# Altium PCB PCB_led_hearrt.PcbDoc
Units mm, origin at the board's own origin, x right, y up, seen from the top; angles counter-clockwise.
Board outline 98.43 x 98.81 mm, 2 copper layers (Top Layer, Bottom Layer); 105 components, 66 nets, 350 pads, 60 vias.
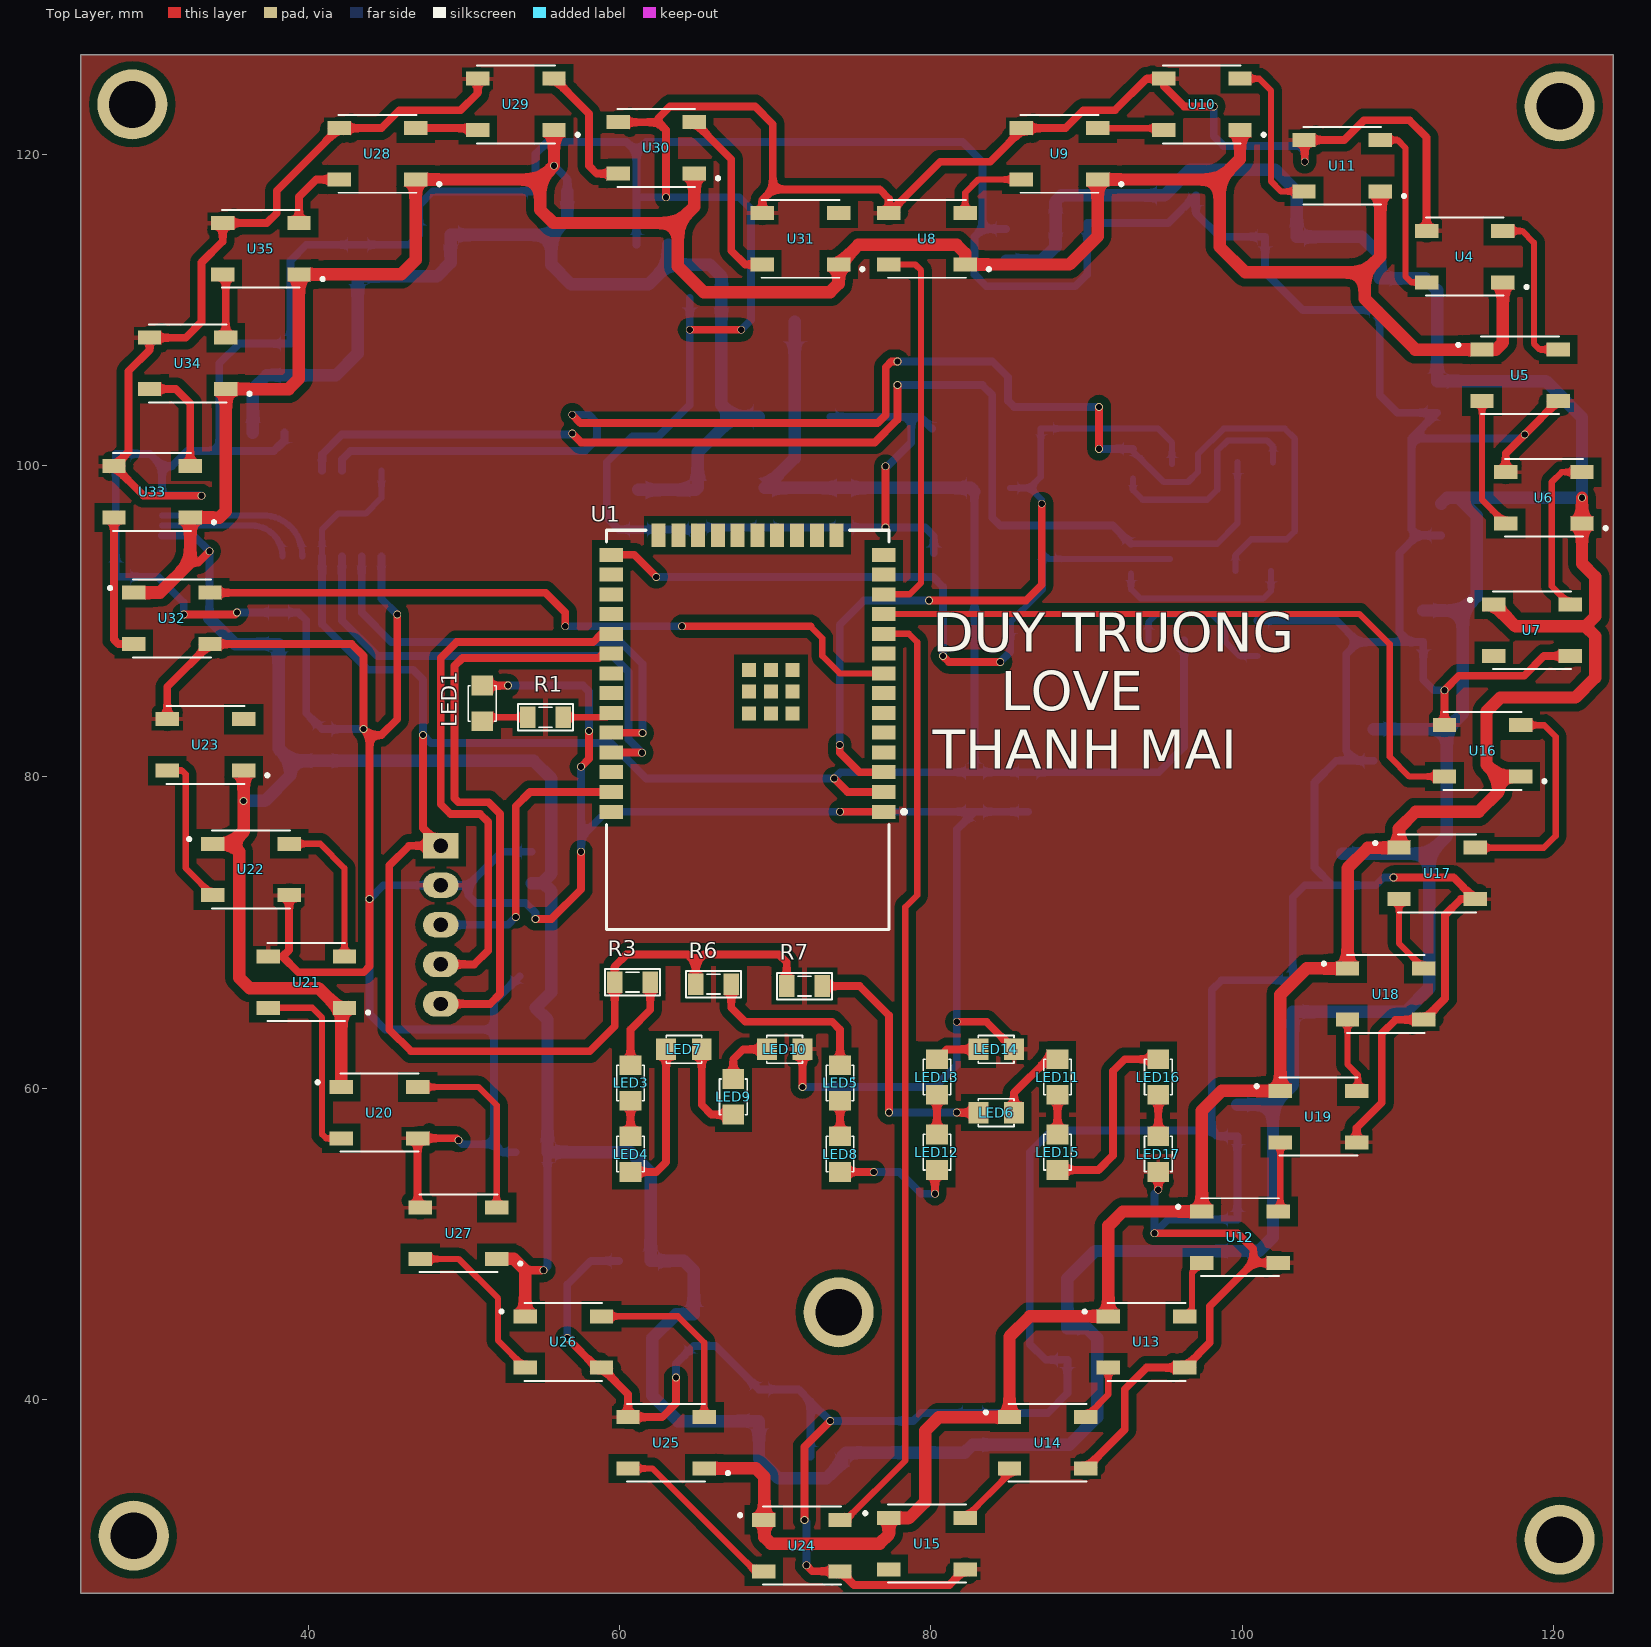
[diagram p0: Top Layer view]
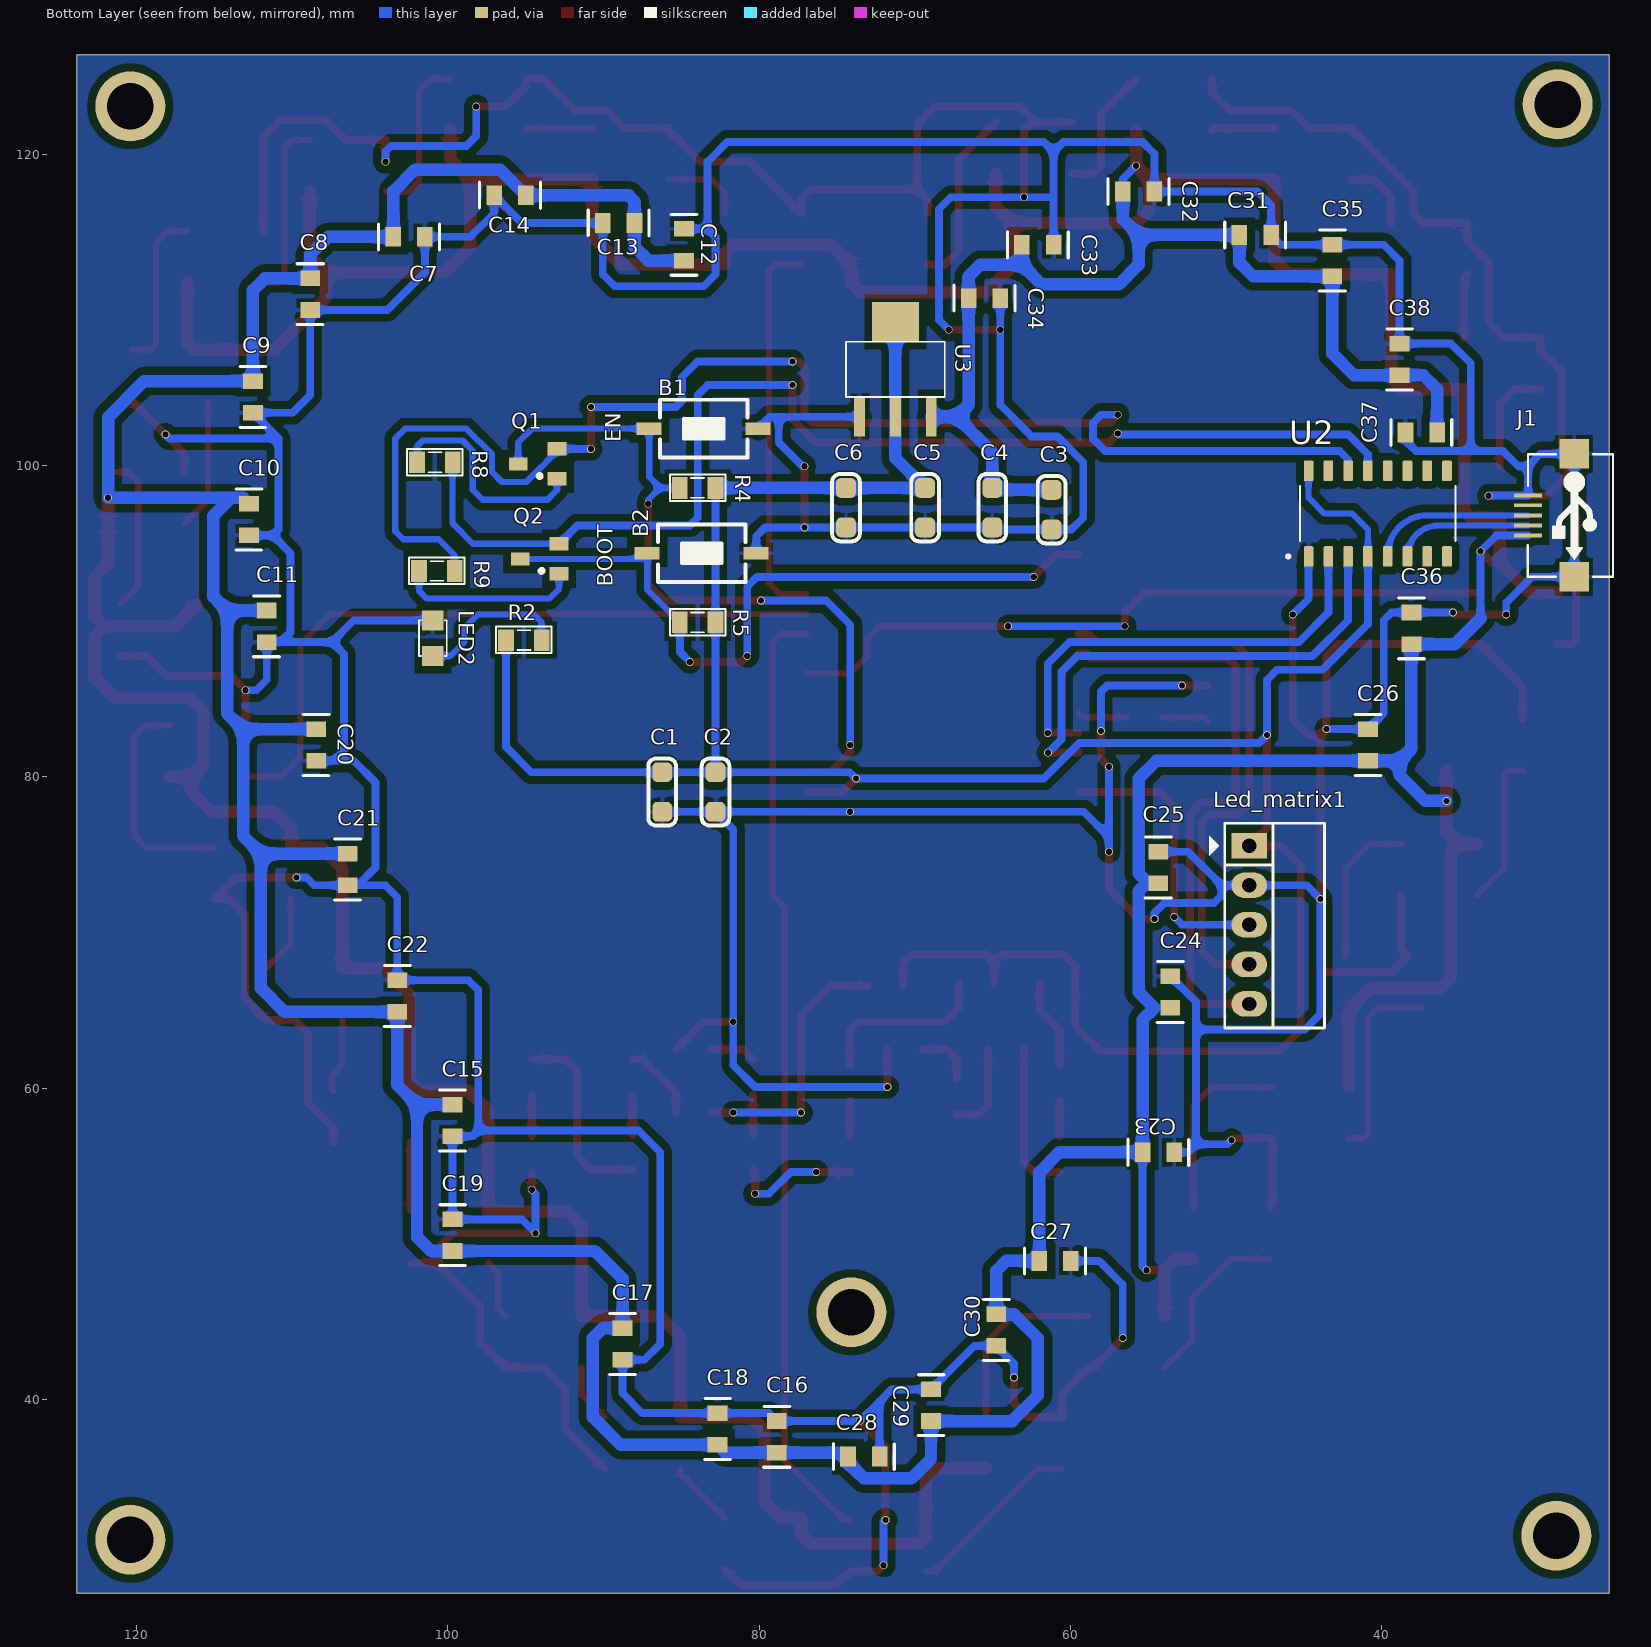
[diagram p1: Bottom Layer view, seen from below]
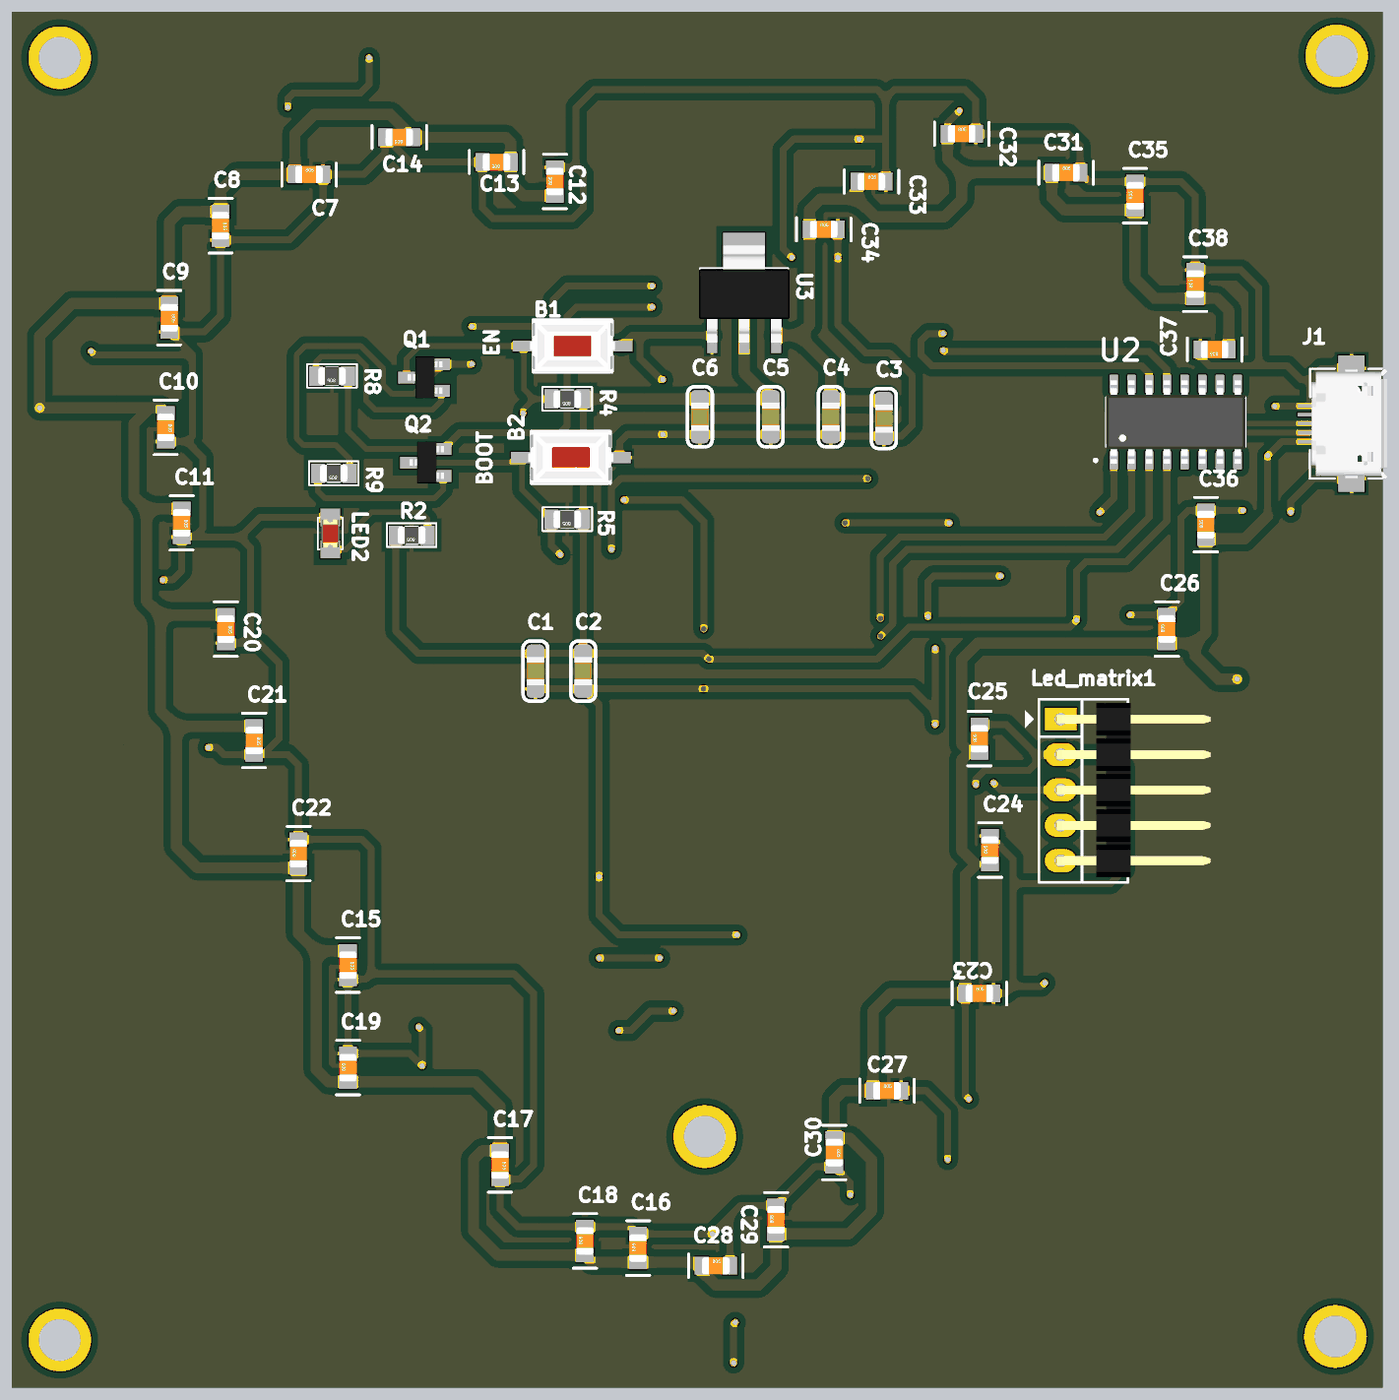
[diagram p2: 3D render of the assembled board from below, using the file's embedded part models]

## Layer stack, top to bottom
Top Solder: solder mask 0.0102, Solder Resist, Dk 3.5
Top Layer: signal copper 0.0356
Dielectric 1: dielectric 0.32, FR-4, Dk 4.8
Bottom Layer: signal copper 0.0356
Bottom Solder: solder mask 0.0102, Solder Resist, Dk 3.5

## Board outline
25.4,126.365 123.825,126.365 123.825,27.559 25.4,27.559

## Design rules (kind name [scope] priority, off if disabled: settings)
Clearance [All] p1: gap=0.178 ignorepadtopadclearanceinfootprint=FALSE except(0.254: Arc-Via Track-Via SMDPad-Via THPad-Via Via-Via; 0.508: Arc-Fill Arc-Poly Arc-Region Track-Fill Track-Poly Track-Region SMDPad-Fill SMDPad-Poly SMDPad-Region THPad-Fill THPad-Poly THPad-Region Via-Fill Via-Poly Via-Region Fill-Fill Fill-Poly Fill-Region Poly-Poly Poly-Region Region-Region)
PolygonConnect [All] p1: connectstyle=Relief reliefconductorwidth=0.254 reliefentries=4 polygonreliefangle="90 Angle" airgapwidth=0.254
RoutingVias [All] p1: holewidth=0.4 width=0.5 viastyle="Through Hole" minholewidth=0.4 minwidth=0.5 maxholewidth=0.5 maxwidth=0.7
SolderMaskExpansion [All] p1: expansion=0.102
Width [All] p1: maxlimit=0.8 minlimit=0.4 preferedwidth=0.5
30 further rules are at their usual default settings.

## Classes and differential pairs
component class U_led: C7 C8 C9 C10 C11 C12 C13 C14 C15 C16 C17 C18 C19 C20 C21 C22 C23 C24 C25 C26 C27 C28 C29 C30 C31 C32 C33 C34 C35 C36 C37 C38 U4 U5 U6 U7 U8 U9 U10 U11 U12 U13 U14 U15 U16 U17 U18 U19 U20 U21 U22 U23 U24 U25 U26 U27 U28 U29 U30 U31 U32 U33 U34 U35
component class U_esp32: B1 B2 C1 C2 C3 C4 C5 C6 J1 LED1 LED2 LED3 LED4 LED5 LED6 LED7 LED8 LED9 LED10 LED11 LED12 LED13 LED14 LED15 LED16 LED17 Led_matrix1 Q1 Q2 R1 R2 R3 R4 R5 R6 R7 R8 R9 U1 U2 U3

## Components (designator, comment, footprint, x,y, rotation, side; value= is the part's Value field where it differs from the comment)
B1 "EN" BUTTON_2_SMD 83.566,102.362 r0 bottom
B2 "BOOT" BUTTON_2_SMD 83.693,94.361 r0 bottom
C1 "100nF" CAP_0805 86.233,79.018 r270 bottom value=33p
C2 "10uF" CAP_0805 82.804,79.018 r270 bottom value=33p
C3 "10uF" CAP_0805 61.214,97.155 r270 bottom value=33p
C4 "100nF" CAP_0805 65.024,97.282 r270 bottom value=33p
C5 "10uF" CAP_0805 69.342,97.282 r270 bottom value=33p
C6 "100nF" CAP_0805 74.422,97.282 r270 bottom value=33p
C7 "Capacitor Ceramic" C0805 102.489,114.681 r180 bottom value=33p
C8 "Capacitor Ceramic" C0805 108.839,110.998 r270 bottom value=33p
C9 "Capacitor Ceramic" C0805 112.522,104.394 r270 bottom value=33p
C10 "Capacitor Ceramic" C0805 112.776,96.52 r270 bottom value=33p
C11 "Capacitor Ceramic" C0805 111.633,89.662 r270 bottom value=33p
C12 "Capacitor Ceramic" C0805 84.836,114.173 r90 bottom value=33p
C13 "Capacitor Ceramic" C0805 89.027,115.57 r0 bottom value=33p
C14 "Capacitor Ceramic" C0805 96.012,117.348 r0 bottom value=33p
C15 "Capacitor Ceramic" C0805 99.695,57.912 r270 bottom value=33p
C16 "Capacitor Ceramic" C0805 78.867,37.592 r90 bottom value=33p
C17 "Capacitor Ceramic" C0805 88.773,43.561 r270 bottom value=33p
C18 "Capacitor Ceramic" C0805 82.677,38.1 r90 bottom value=33p
C19 "Capacitor Ceramic" C0805 99.695,50.546 r90 bottom value=33p
C20 "Capacitor Ceramic" C0805 108.458,82.036 r270 bottom value=33p
C21 "Capacitor Ceramic" C0805 106.426,74.041 r270 bottom value=33p
C22 "Capacitor Ceramic" C0805 103.251,65.913 r90 bottom value=33p
C23 "Capacitor Ceramic" C0805 54.356,55.88 r180 bottom value=33p
C24 "Capacitor Ceramic" C0805 53.594,66.167 r90 bottom value=33p
C25 "Capacitor Ceramic" C0805 54.356,74.168 r90 bottom value=33p
C26 "Capacitor Ceramic" C0805 40.894,82.042 r90 bottom value=33p
C27 "Capacitor Ceramic" C0805 60.987,48.895 r180 bottom value=33p
C28 "Capacitor Ceramic" C0805 73.279,36.322 r180 bottom value=33p
C29 "Capacitor Ceramic" C0805 68.961,39.624 r90 bottom value=33p
C30 "Capacitor Ceramic" C0805 64.77,44.45 r270 bottom value=33p
C31 "Capacitor Ceramic" C0805 48.133,114.808 r180 bottom value=33p
C32 "Capacitor Ceramic" C0805 55.626,117.602 r180 bottom value=33p
C33 "Capacitor Ceramic" C0805 62.103,114.173 r180 bottom value=33p
C34 "Capacitor Ceramic" C0805 65.532,110.744 r180 bottom value=33p
C35 "Capacitor Ceramic" C0805 43.18,113.157 r90 bottom value=33p
C36 "Capacitor Ceramic" C0805 38.1,89.535 r90 bottom value=33p
C37 "Capacitor Ceramic" C0805 37.465,102.108 r0 bottom value=33p
C38 "Capacitor Ceramic" C0805 38.862,106.807 r90 bottom value=33p
J1 "USB-5" USB-M1 30.607,96.789 r270 bottom
LED1 "LED" LED-0805-Red 51.181,83.565 r90 top value="LED 3 ly Single Colour"
LED2 "LED" LED-0805-Red 100.965,87.757 r90 bottom value="LED 3 ly Single Colour"
LED3 "LED" LED-0805-Red 60.706,61.468 r270 top value="LED 3 ly Single Colour"
LED4 "LED" LED-0805-Red 60.706,56.896 r270 top value="LED 3 ly Single Colour"
LED5 "LED" LED-0805-Red 74.168,61.468 r270 top value="LED 3 ly Single Colour"
LED6 "LED" LED-0805-Red 83.058,58.42 r0 top value="LED 3 ly Single Colour"
LED7 "LED" LED-0805-Red 62.992,62.484 r0 top value="LED 3 ly Single Colour"
LED8 "LED" LED-0805-Red 74.168,56.896 r270 top value="LED 3 ly Single Colour"
LED9 "LED" LED-0805-Red 67.31,58.293 r90 top value="LED 3 ly Single Colour"
LED10 "LED" LED-0805-Red 69.469,62.484 r0 top value="LED 3 ly Single Colour"
LED11 "LED" LED-0805-Red 88.138,61.849 r270 top value="LED 3 ly Single Colour"
LED12 "LED" LED-0805-Red 80.391,54.737 r90 top value="LED 3 ly Single Colour"
LED13 "LED" LED-0805-Red 80.391,59.563 r90 top value="LED 3 ly Single Colour"
LED14 "LED" LED-0805-Red 83.058,62.484 r0 top value="LED 3 ly Single Colour"
LED15 "LED" LED-0805-Red 88.138,57.023 r270 top value="LED 3 ly Single Colour"
LED16 "LED" LED-0805-Red 94.615,61.849 r270 top value="LED 3 ly Single Colour"
LED17 "LED" LED-0805-Red 94.615,56.896 r270 top value="LED 3 ly Single Colour"
Led_matrix1 "JP5" JP5H 48.514,75.565 r270 bottom
Q1 "C1815" SOT23 94.234,100.076 r90 bottom
Q2 "C1815" SOT23 94.107,93.98 r90 bottom
R1 "1k" RES-SMD-0805 55.245,83.819 r0 top
R2 "1k" RES-SMD-0805 95.123,88.773 r0 bottom
R3 "120" RES-SMD-0805 60.833,66.802 r0 top
R4 "10k" RES-SMD-0805 83.947,98.552 r0 bottom
R5 "10k" RES-SMD-0805 83.947,89.916 r0 bottom
R6 "120" RES-SMD-0805 66.04,66.675 r0 top
R7 "120" RES-SMD-0805 71.882,66.549 r0 top
R8 "10k" RES-SMD-0805 100.838,100.203 r0 bottom
R9 "10k" RES-SMD-0805 100.711,93.218 r0 bottom
U1 "ESP32-WROOM-32" ESP32_WROOM32E 68.531,85.345 r180 top
U2 "CH340C" SOIC127P600X180-16N 40.259,96.901 r90 bottom
U3 "LM1117-ADJ" LM1117-SOP 71.247,104.394 r180 bottom
U4 "WS2812B-B" LED_WS2812B-B 114.3,113.411 r180 top
U5 "WS2812B-B" LED_WS2812B-B 117.856,105.791 r0 top
U6 "WS2812B-B" LED_WS2812B-B 119.38,97.917 r180 top
U7 "WS2812B-B" LED_WS2812B-B 118.618,89.408 r0 top
U8 "WS2812B-B" LED_WS2812B-B 79.756,114.554 r180 top
U9 "WS2812B-B" LED_WS2812B-B 88.265,120.015 r180 top
U10 "WS2812B-B" LED_WS2812B-B 97.409,123.19 r180 top
U11 "WS2812B-B" LED_WS2812B-B 106.426,119.253 r180 top
U12 "WS2812B-B" LED_WS2812B-B 99.859,50.419 r0 top
U13 "WS2812B-B" LED_WS2812B-B 93.853,43.688 r0 top
U14 "WS2812B-B" LED_WS2812B-B 87.503,37.211 r0 top
U15 "WS2812B-B" LED_WS2812B-B 79.756,30.734 r0 top
U16 "WS2812B-B" LED_WS2812B-B 115.443,81.661 r180 top
U17 "WS2812B-B" LED_WS2812B-B 112.522,73.787 r0 top
U18 "WS2812B-B" LED_WS2812B-B 109.22,66.04 r0 top
U19 "WS2812B-B" LED_WS2812B-B 104.902,58.166 r0 top
U20 "WS2812B-B" LED_WS2812B-B 44.577,58.42 r0 top
U21 "WS2812B-B" LED_WS2812B-B 39.878,66.802 r180 top
U22 "WS2812B-B" LED_WS2812B-B 36.322,74.041 r0 top
U23 "WS2812B-B" LED_WS2812B-B 33.401,82.042 r180 top
U24 "WS2812B-B" LED_WS2812B-B 71.718,30.607 r0 top
U25 "WS2812B-B" LED_WS2812B-B 62.992,37.211 r180 top
U26 "WS2812B-B" LED_WS2812B-B 56.388,43.688 r0 top
U27 "WS2812B-B" LED_WS2812B-B 49.657,50.673 r180 top
U28 "WS2812B-B" LED_WS2812B-B 44.45,120.015 r180 top
U29 "WS2812B-B" LED_WS2812B-B 53.34,123.19 r180 top
U30 "WS2812B-B" LED_WS2812B-B 62.357,120.396 r180 top
U31 "WS2812B-B" LED_WS2812B-B 71.628,114.554 r180 top
U32 "WS2812B-B" LED_WS2812B-B 31.242,90.17 r0 top
U33 "WS2812B-B" LED_WS2812B-B 29.972,98.298 r180 top
U34 "WS2812B-B" LED_WS2812B-B 32.258,106.553 r180 top
U35 "WS2812B-B" LED_WS2812B-B 36.957,113.919 r180 top

## Footprints (in the part's own frame and the unit in brackets; to place one, negate y for a bottom-side part, rotate by r counter-clockwise, add the part's x,y. Pads: shape width x height; smd on the part's side, far side on the other; paste and mask are expansions set on the pad)
BUTTON_2_SMD [mm]
  rect 1.6x0.8 smd: 1(-3.5,0) 2(3.5,0)
  silkscreen extent -2.82,-1.85 2.82,1.85, body extent -3.05,-1.85 3.05,1.85, height 2.5
C0805 [mm] "Chip Resistor; Body 2.0 x 1.3 mm (LxW typ)"
  rect 1x1.27 smd: 1(-1.016,0) 2(1.016,0)
  silkscreen extent -1.96,-0.84 1.96,0.84, body extent -1,-0.62 1,0.63, height 0.78
CAP_0805 [mm]
  rrect50% 1.27x1.27 smd: 1(-1.27,0) 2(1.27,0)
  silkscreen extent -2.16,-0.89 2.16,0.89, body extent -1.01,-0.64 1.01,0.64, height 0.61
ESP32_WROOM32E [mm] "ESP32_WROOM32E"
  rect 1.5x0.9 smd paste+0 mask+0: 1(-8.445,7.597) 2(-8.445,6.327) 3(-8.445,5.057) 4(-8.445,3.787) 5(-8.445,2.517) 6(-8.445,1.247) 7(-8.445,-0.023) 8(-8.445,-1.293) 9(-8.445,-2.563) 10(-8.445,-3.833) 11(-8.445,-5.103) 12(-8.445,-6.373) 13(-8.445,-7.643) 14(-8.445,-8.913) 25(9.055,-8.913) 26(9.055,-7.643) 27(9.055,-6.373) 28(9.055,-5.103) 29(9.055,-3.833) 30(9.055,-2.563) 31(9.055,-1.293) 32(9.055,-0.023) 33(9.055,1.247) 34(9.055,2.517) 35(9.055,3.787) 36(9.055,5.057) 37(9.055,6.327) 38(9.055,7.597)
  rect 0.9x1.5 smd paste+0 mask+0: 15(-5.41,-10.163) 16(-4.14,-10.163) 17(-2.87,-10.163) 18(-1.6,-10.163) 19(-0.33,-10.163) 20(0.94,-10.163) 21(2.21,-10.163) 22(3.48,-10.163) 23(4.75,-10.163) 24(6.02,-10.163)
  rect 0.9x0.9 smd paste+0 mask+0: 39(-2.595,-0.123) 39(-2.595,1.277) 39(-2.595,-1.523) 39(-1.195,1.277) 39(-1.195,-0.123) 39(-1.195,-1.523) 39(0.205,1.277) 39(0.205,-0.123) 39(0.205,-1.523)
  silkscreen extent -9.87,-10.49 9.38,15.16, body extent -9.3,-11.01 9.9,15.26, height 0.25
JP5H [mil]
  rect 65x90 hole 36: 1(0,0)
  oval 65x90 hole 36: 2(100,0) 3(200,0) 4(300,0) 5(400,0)
  silkscreen extent -57,-101 461,190, body extent -46,-15 446,424, height 99
LED-0805-Red [mil]
  rect 50x55 smd: 1(0,0) 2(90,0)
  silkscreen extent 0,-35 90,35, body extent 5,-25 85,25, height 43
LED_WS2812B-B [mm]
  rect 1.5x0.9 smd: 1(-2.45,1.65) 2(-2.45,-1.65) 3(2.45,-1.65) 4(2.45,1.65)
  silkscreen extent -4.07,-2.5 2.5,2.5
LM1117-SOP [mm]
  rect 0.7x2.54 smd: 1(-2.3,-1.27) 2(0,-1.27) 3(2.3,-1.27)
  rect 3x2.54 smd: 2(0,4.826)
  silkscreen extent -3.17,0 3.18,3.56, body extent -3.25,-1.78 3.25,5.18, height 1.68
RES-SMD-0805 [mil]
  rect 39.37x55 smd: 1(-45,0) 2(45,0)
  silkscreen extent -70,-34 70,33, body extent -39,-25 39,25, height 31
SOIC127P600X180-16N [mm]
  rrect25% 1.31x0.62 smd: 1(-2.75,4.445) 2(-2.75,3.175) 3(-2.75,1.905) 4(-2.75,0.635) 5(-2.75,-0.635) 6(-2.75,-1.905) 7(-2.75,-3.175) 8(-2.75,-4.445) 9(2.75,-4.445) 10(2.75,-3.175) 11(2.75,-1.905) 12(2.75,-0.635) 13(2.75,0.635) 14(2.75,1.905) 15(2.75,3.175) 16(2.75,4.445)
  silkscreen extent -2.85,-5 1.78,5.85, body extent -3,-5 3,5, height 1.8
SOT23 [mm] "SOT 23 _ 1-3-2"
  rect 0.85x1.2 smd: 1(-0.94,-1.245) 2(0.985,-1.25) 3(0.005,1.25)
  silkscreen extent -0.88,-0.25 -0.64,0, body extent -1.47,-1.33 1.53,1.17, height 1.06
USB-M1 [mil]
  rect 10x70 smd: 1(51.18,0) 2(25.59,0) 3(0,0) 4(-25.59,0) 5(-50,0)
  rect 74.8x74.8 smd: 5(-155.51,116.84) 5(155.51,116.84)
  silkscreen extent -155,-1 155,215, body extent -157,5 158,218, height 107

## Part data
B1 B2: library part "Button 3x4x2.5"
C1 C2 C3 C4 C5 C6 C7 C8 C9 C10 C11 C12 C13 C14 C15 C16 C17 C18 C19 C20 C21 C22 C23 C24 C25 C26 C27 C28 C29 C30 C31 C32 C33 C34 C35 C36 C37 C38: library part CapSMD, "Capacitor", LatestRevisionDate=17-Jul-2002, LatestRevisionNote="Re-released for DXP Platform.", PackageReference=RAD-0.3, Published=8-Jun-2000, Publisher="Altium Limited"
J1: Manufacturer=FCI, Manufacturer Part Number=10118193-0001LF, Supplier Part Number 1=609-4616-1-ND, .Checked PCB=RF, .Checked SCH=MM, .Creator=MM, Category="Connectors, Interconnects", ComponentLink1Description=http://portal.fciconnect.com/Comergent//fci/drawing/10118193.pdf, ComponentLink1URL=http://portal.fciconnect.com/Comergent//fci/drawing/10118193.pdf, Connector Type="USB - micro B", Features="Shielded, Solder Retention", Gender=Receptacle, Ingress Protection=-, Mounting Type="Surface Mount, Right Angle, Horizontal", Number of Contacts=5, Packaging="Cut Tape (CT)", Pricing 1="1=0.46, 10=0.433, 25=0.3712, 50=0.3156, 100=0.3032, 250=0.27224, 500=0.25988 (USD)", RoHS="RoHS Compliant", Specifications="USB 2.0", Stock 1=28642, Supplier 1=Digi-Key
LED1 LED2 LED3 LED4 LED5 LED6 LED7 LED8 LED9 LED10 LED11 LED12 LED13 LED14 LED15 LED16 LED17: "LED Single colour Green and Red"
Q1 Q2: library part 2SC1815, "NPN 600mW, ECB", =C2383
R1 R2 R3 R4 R5 R6 R7 R8 R9: library part "Resistor - SMD", "Resistor", Manufacturer="Generic Components", Class=Passive, Published=08/06/2000, Publisher="Altium Hobart Technology Centre"
U1: "Bluetooth, WiFi Transceiver Module 2.4GHz ~ 2.5GHz Surface Mount", Package="Module Espressif Systems", Digi-Key_Part_Number=1904-1010-1-ND, Digi-Key_Purchase_URL=https://www.digikey.com/product-detail/en/espressif-systems/ESP32-WROOM-32/1904-1010-1-ND/8544305?utm_source=snapeda&utm_medium=aggregator&utm_campaign=symbol, MF="Espressif Systems", MP=ESP32-WROOM-32, SnapEDA_Link=https://www.snapeda.com/parts/ESP32-WROOM-32/Espressif%20Systems/view-part/2753322/?ref=snap
U2: "USB to serial chip CH340", Package=None, Availability="Not in stock", Check_prices=https://www.snapeda.com/parts/CH340C/WCH/view-part/?ref=eda, MF=WCH, MP=CH340C, Price=None, SnapEDA_Link=https://www.snapeda.com/parts/CH340C/WCH/view-part/?ref=snap
U3: "800mA Low-Dropout Linear Regulator", Creator="Nguyen Ba Bien", Website=http://group3i.net
U4 U5 U6 U7 U8 U9 U10 U11 U12 U13 U14 U15 U16 U17 U18 U19 U20 U21 U22 U23 U24 U25 U26 U27 U28 U29 U30 U31 U32 U33 U34 U35: "Intelligent control LED integrated light source", Package=None, Availability=Unavailable, MP=WS2812B-B, Price=None

## Free pads (board coordinates)
  round 4.5 hole 3: 2(28.702,123.19) 3(120.396,123.063) 4(74.078,45.593) 4(120.396,30.988) 5(28.792,31.242)

## Via types
v1: diameter 0.5, hole 0.4, Top Layer to Bottom Layer, 60 vias

## Nets (pads, with @x,y where several pads share a name; then routed paths per layer and width w, separated by ;. In a path a pad name is that pad's centre, name@x,y a point inside that pad or via, vN(x,y) a via of type N, cw(c..) or ccw(c..) an arc to the next point about the centre after c; other vN are vias at no path point)
+3.3V: C1.1 C2.1 C5.1 C6.1 Led_matrix1.1 R2.2 R3.1 R4.1 R5.1 R6.1 R7.1 U1.2 U2.4 U2.16 U3.2 | length 185
  Top Layer w0.5: v1(47.371,82.677) 47.371,76.708 Led_matrix1.1 46.482,75.565 45.212,74.295 45.212,63.754 46.609,62.357 58.076,62.357 59.69,63.971 R3.1 59.69,67.818 60.452,68.58 64.389,68.58 64.897,68.072 ; R6.1 64.897,68.072 ; R7.1 70.739,68.072 70.231,68.58 65.405,68.58 64.897,68.072 ; v1(73.787,79.883) 74.652,79.018 U1.2
  Bottom Layer w0.4: U2.4 40.894,95.885 41.91,96.901 43.688,96.901 44.704,97.917 U2.16
  Bottom Layer w0.5: U2.4 40.894,89.789 43.815,86.868 46.736,86.868 47.371,86.233 v1(47.371,82.677) 47.879,82.169 59.436,82.169 61.722,79.883 v1(73.787,79.883) 74.192,80.288 C2.1 ; R4.1 R5.1 C2.1 ; R2.2 96.266,81.915 94.639,80.288 C1.1 C2.1
  Bottom Layer w0.8: U3.2@71.247,109.22 71.247,103.124 71.247,100.457 C5.1 C6.1 82.55,98.552 R4.1@82.804,98.298
+5: C3.1 C4.1 C7.1 C8.1 C9.1 C10.1 C11.1 C12.1 C13.1 C14.1 C15.1 C16.1 C17.1 C18.1 C19.1 C20.1 C21.1 C22.1 C23.1 C24.1 C25.1 C26.1 C27.1 C28.1 C29.1 C30.1 C31.1 C32.1 C33.1 C34.1 C35.1 C36.1 C37.1 C38.1 J1.1 U3.3 U4.1 U5.1 U6.1 U7.1 U8.1 U9.1 U10.1 U11.1 U12.1 U13.1 U14.1 U15.1 U16.1 U17.1 U18.1 U19.1 U20.1 U21.1 U22.1 U23.1 U24.1 U25.1 U26.1 U27.1 U28.1 U29.1 U30.1 U31.1 U32.1 U33.1 U34.1 U35.1 | length 692.3
  Top Layer w0.5: 32.422,93.763 32.93,93.763 v1(33.655,94.488) ; 53.938,48.298 v1(55.118,48.298)
  Top Layer w0.8: U32.1 30.479,91.82 32.422,93.763 U33.1 34.291,96.648 34.708,97.065 U34.1 38.736,104.903 39.407,105.574 U35.1 45.975,112.269 46.9,113.194 U28.1 54.902,118.365 ; U22.1 35.051,75.691 ; U23.1 v1(35.851,78.442) 35.851,76.491 35.051,75.691 ; U20.1 42.127,64.951 40.657,66.421 36.232,66.421 35.56,67.093 35.56,75.182 35.051,75.691 ; U27.1 53.213,49.023 53.938,48.298 U26.1 ; U29.1 v1(55.79,119.253) 54.902,118.365 ; U30.1 64.807,116.623 63.754,115.57 ; U25.1 68.758,35.561 69.305,35.014 69.305,31.152 69.723,30.734 76.708,30.734 77.306,31.332 U15.1 78.612,32.384 79.629,33.401 79.629,37.973 80.517,38.861 U14.1 85.053,44.032 86.359,45.338 U13.1 91.403,51.144 92.328,52.069 U12.1 97.409,58.547 98.678,59.816 U19.1 102.452,66.003 104.139,67.69 U18.1 106.77,74.131 108.076,75.437 U17.1 110.072,76.671 111.149,77.748 115.189,77.748 116.458,79.017 116.458,80.011 ; U10.1 99.859,119.671 98.553,118.365 ; U11.1 108.876,113.411 107.86,112.395 ; U7.1 117.564,89.662 122.047,89.662 ; U4.1 116.75,107.897 116.294,107.441 U5.1 111.126,107.441 107.86,110.707 107.86,112.395 ; U16.1 116.458,80.011 ; v1(121.83,97.917) U6.1 121.83,93.689 122.682,92.837 122.682,90.297 122.047,89.662 ; 54.902,118.365 54.902,116.421 55.753,115.57 63.754,115.57 ; 63.754,115.57 63.754,112.777 65.406,111.125 73.533,111.125 74.078,111.67 U31.1 75.347,114.173 81.661,114.173 82.206,113.628 U8.1 88.901,112.904 90.715,114.718 U9.1 98.553,118.365 ; 98.553,118.365 98.553,114.045 100.203,112.395 107.86,112.395 ; 116.458,80.011 115.697,80.772 115.697,84.201 116.586,85.09 121.412,85.09 122.682,86.36 122.682,89.027 122.047,89.662
  Bottom Layer w0.5: J1.1 32.654,95.489 v1(33.655,94.488) 33.655,90.17 ; v1(55.118,48.298) 55.372,48.552 C23.1 ; v1(55.79,119.253) 56.642,118.401 C32.1
  Bottom Layer w0.8: 33.655,90.17 35.306,88.519 C36.1 38.1,81.788 38.862,81.026 ; v1(35.851,78.442) 37.211,78.442 38.862,80.093 38.862,81.026 ; C37.1 36.449,104.902 37.338,105.791 C38.1 41.783,105.791 43.18,107.188 C35.1 48.26,112.141 49.149,113.03 C31.1 55.626,114.808 ; C25.1 54.991,73.152 ; C32.1 56.642,115.824 55.626,114.808 ; C3.1 64.897,98.425 C4.1 65.024,100.838 67.31,103.124 ; C33.1 63.119,112.903 ; U3.3 67.31,103.124 ; C12.1 87.122,113.157 88.011,114.046 C13.1 88.011,116.967 88.392,117.348 C14.1 96.647,118.999 102.108,118.999 103.505,117.602 C7.1 107.696,114.681 108.839,113.538 C8.1 111.76,112.014 112.522,111.252 C9.1 119.507,105.41 121.83,103.087 v1(121.83,97.917) 113.919,97.917 ; C15.1 101.981,58.928 ; C21.1 112.014,75.057 ; C20.1 113.151,83.052 ; C11.1 114.173,90.678 ; C10.1 113.157,97.917 113.919,97.917 ; 38.862,81.026 C26.1 54.483,81.026 55.626,79.883 55.626,73.787 54.991,73.152 ; 54.991,73.152 55.118,73.152 55.626,72.644 55.626,66.167 54.61,65.151 55.372,64.389 C23.1 60.706,55.88 62.003,54.583 C27.1 64.135,48.895 64.77,48.26 C30.1 63.627,45.466 62.103,43.942 62.103,40.259 63.754,38.608 C29.1 68.961,36.181 70.217,34.925 73.279,34.925 74.295,35.941 C28.1 74.549,36.576 C16.1 82.169,36.576 C18.1 88.9,37.084 90.678,38.862 90.678,43.942 90.043,44.577 C17.1 88.773,47.752 90.551,49.53 C19.1 101.092,49.53 101.981,50.419 101.981,58.928 ; 55.626,114.808 55.626,112.903 56.896,111.633 61.849,111.633 63.119,112.903 ; 63.119,112.903 65.786,112.903 66.548,112.141 C34.1 66.548,103.886 67.31,103.124 ; 101.981,58.928 103.251,60.198 C22.1 110.49,64.897 112.014,66.421 112.014,75.057 ; 112.014,75.057 113.151,76.194 113.151,83.052 ; 113.151,83.052 114.173,84.074 114.173,90.678 ; 113.919,97.917 115.062,96.774 115.062,91.567 114.173,90.678
CH340_RXD: U1.35 U2.3 | length 31.4
  Top Layer w0.5: U1.35 61.42,81.558 v1(61.444,81.534)
  Bottom Layer w0.5: U2.3 42.164,90.043 44.45,87.757 59.563,87.757 60.579,86.741 60.579,82.399 v1(61.444,81.534)
CH340_TXD: U1.34 U2.2 | length 29.4
  Top Layer w0.5: U1.34 61.444,82.828 v1(61.468,82.804)
  Bottom Layer w0.5: U2.2 43.434,90.551 45.339,88.646 60.071,88.646 61.468,87.249 v1(61.468,82.804)
D_N: J1.2 U2.6 | length 8.9
  Bottom Layer w0.4: J1.2 36.366,96.139 cw(c36.366,94.151) U2.6
D_P: J1.3 U2.5 | length 10.6
  Bottom Layer w0.4: J1.3 37.084,96.789 cw(c37.084,94.249) 39.624,94.249 U2.5
DTR: Q2.2 R8.1 U2.13 | length 76.8
  Top Layer w0.5: v1(56.959,102.044) 57.531,101.473 76.398,101.473 77.851,102.926 v1(77.851,105.156)
  Bottom Layer w0.4: Q2.2 98.394,94.965 99.695,96.266 R8.1
  Bottom Layer w0.5: U2.13 40.894,100.711 42.164,101.981 56.896,101.981 v1(56.959,102.044) ; v1(77.851,105.156) 83.312,105.156 83.947,104.521 83.947,96.647 84.455,96.139 91.683,96.139 Q2.2
EN: B1.2 Q1.3 R4.2 U1.3 | length 47.7
  Top Layer w0.5: v1(74.144,82.042) 74.144,81.558 75.414,80.288 U1.3 ; v1(79.883,91.313) 86.106,91.313 87.122,92.329 v1(87.122,97.536)
  Bottom Layer w0.4: R4.2 86.36,98.552 ; v1(87.122,97.536) 87.122,97.79 86.36,98.552 ; Q1.3 95.484,101.473 94.595,102.362 B1.2 87.066,99.258 86.36,98.552
  Bottom Layer w0.5: v1(74.144,82.042) 74.144,89.765 75.692,91.313 v1(79.883,91.313)
GND: B1.1 B2.1 C1.2 C2.2 C3.2 C4.2 C5.2 C6.2 C7.2 C8.2 C9.2 C10.2 C11.2 C12.2 C13.2 C14.2 C15.2 C16.2 C17.2 C18.2 C19.2 C20.2 C21.2 C22.2 C23.2 C24.2 C25.2 C26.2 C27.2 C28.2 C29.2 C30.2 C31.2 C32.2 C33.2 C34.2 C35.2 C36.2 C37.2 C38.2 J1.5 LED1.2 LED2.2 LED10.2 LED14.2 LED17.2 Led_matrix1.2 U1.1 U2.1 U3.1 U4.3 U5.3 U6.3 U7.3 U8.3 U9.3 U10.3 U11.3 U12.3 U13.3 U14.3 U15.3 U16.3 U17.3 U18.3 U19.3 U20.3 U21.3 U22.3 U23.3 U24.3 U25.3 U26.3 U27.3 U28.3 U29.3 U30.3 U31.3 U32.3 U33.3 U34.3 U35.3 | length 863
  Top Layer w0.5: U23.3 30.951,85.779 U32.3 42.798,88.52 43.561,87.757 v1(43.561,83.058) 43.942,82.677 ; v1(32.004,90.424) 35.306,90.424 v1(35.433,90.551) ; v1(33.147,98.044) 29.426,98.044 U33.3 28.448,100.874 28.448,106.045 29.808,107.405 U34.3 32.13,108.203 33.147,109.22 33.147,113.03 34.507,114.39 U35.3 37.337,115.569 37.973,116.205 37.973,117.638 U28.3 44.703,121.665 45.847,122.809 49.784,122.809 50.89,123.915 U29.3 ; U22.3 38.772,68.871 38.353,68.452 39.368,67.437 43.561,67.437 43.942,67.818 v1(43.942,72.137) 43.942,82.677 ; v1(45.72,90.424) 45.72,83.693 44.704,82.677 43.942,82.677 ; U27.3 47.027,52.503 U20.3 49.528,56.77 v1(49.656,56.642) ; LED1.2 v1(52.832,85.852) v1(52.832,85.852) ; v1(54.61,70.866) 55.626,70.866 57.531,72.771 v1(57.531,75.184) ; v1(56.642,43.942) 58.546,42.038 U26.3 60.542,40.334 U25.3 62.737,38.861 63.627,39.751 v1(63.627,41.402) ; v1(57.531,80.645) 58.039,81.153 v1(58.039,82.931) ; U30.3 62.486,122.046 ; v1(62.992,117.221) 62.992,121.54 62.486,122.046 ; v1(64.516,108.712) v1(67.818,108.712) ; U31.3 69.178,117.057 69.85,117.729 ; v1(71.755,60.071) LED10.2 ; v1(71.882,32.257) 71.882,36.957 v1(73.533,38.608) ; v1(72.009,29.337) 72.389,28.957 U24.3 75.058,28.067 81.189,28.067 U15.3 ; v1(74.168,77.748) U1.1 ; v1(77.089,96.012) v1(77.089,99.949) ; v1(81.661,64.262) 83.566,64.262 LED14.2 ; U14.3 92.456,38.064 92.456,40.64 93.854,42.038 U13.3 97.917,43.652 97.917,45.974 100.712,48.769 ; v1(94.361,50.673) 99.695,50.673 100.712,49.656 100.712,48.769 ; v1(94.615,53.467) LED17.2 ; v1(98.171,123.063) 96.266,123.063 94.959,124.37 U10.3 93.852,124.84 91.821,122.809 89.789,122.809 88.645,121.665 U9.3 85.815,121.502 83.82,119.507 80.609,119.507 U8.3 77.306,117.131 76.708,117.729 69.85,117.729 ; U12.3 100.712,48.769 ; v1(104.013,119.507) 104.013,120.866 U11.3 106.552,120.903 107.823,122.174 110.744,122.174 111.85,121.068 U4.3 ; U19.3 107.352,57.441 108.966,59.055 108.966,63.5 109.856,64.39 U18.3 113.03,65.75 113.03,71.12 114.047,72.137 U17.3 113.576,73.533 v1(109.728,73.533) ; U16.3 v1(112.993,85.561) 113.919,86.487 118.11,86.487 119.381,87.758 U7.3 ; U6.3 116.93,100.765 v1(118.146,101.981) U5.3 ; 62.486,122.046 62.486,122.303 63.246,123.063 68.707,123.063 69.85,121.92 69.85,117.729
  Bottom Layer w0.5: v1(32.004,90.424) 32.004,91.186 30.351,92.839 27.639,92.839 27.639,100.739 29.817,100.739 30.607,99.949 ; v1(33.147,98.044) 33.132,98.059 30.607,98.059 30.607,99.949 ; v1(35.433,90.551) C36.2 39.37,90.551 39.878,90.043 39.878,84.074 C26.2 v1(43.561,83.058) ; C37.2 38.481,101.6 37.811,100.93 34.29,100.93 ; U2.1 44.704,91.44 v1(45.72,90.424) ; v1(49.656,56.642) 49.91,56.388 51.943,56.388 ; v1(52.832,85.852) 57.658,85.852 58.039,85.471 v1(58.039,82.931) ; C23.2 52.451,55.88 51.943,56.388 ; C24.2 51.943,65.532 51.943,63.754 ; C25.2 52.451,75.184 50.292,73.025 ; v1(54.61,70.866) 54.61,71.247 53.975,71.882 50.8,71.882 50.292,72.39 50.292,73.025 ; v1(56.642,43.942) 56.642,47.371 58.166,48.895 C27.2 ; v1(57.531,75.184) 57.531,76.121 ; v1(57.531,80.645) 57.531,76.121 ; C33.2 61.087,117.094 ; v1(63.627,41.402) 63.627,42.291 C30.2 66.167,43.434 C29.2 71.501,40.64 72.263,39.878 ; C34.2 v1(64.516,108.712) 64.516,103.886 62.484,101.854 60.833,101.854 59.182,100.203 59.182,96.647 59.944,95.885 C3.2 64.897,95.885 C4.2 C5.2 C6.2 v1(77.089,96.012) 79.629,96.012 80.193,95.448 B2.1 ; v1(67.818,108.712) 68.453,109.347 68.453,116.459 67.691,117.221 v1(62.992,117.221) 61.087,117.221 61.087,120.142 ; v1(71.755,60.071) 80.264,60.071 81.661,61.468 v1(81.661,64.262) 81.661,76.605 C2.2 ; v1(71.882,32.257) 72.009,32.13 v1(72.009,29.337) ; C28.2 72.263,39.878 ; U3.1 78.74,103.124 ; v1(77.089,99.949) 77.216,99.949 78.74,101.473 78.74,103.124 ; B1.1 79.304,103.124 78.74,103.124 ; C12.2 83.312,115.189 ; C1.2 C2.2 ; v1(94.615,53.467) 94.361,53.213 v1(94.361,50.673) 95.25,51.562 C19.2 C15.2 98.425,56.896 98.044,57.277 ; v1(98.171,123.063) 98.171,121.158 98.806,120.523 103.632,120.523 104.013,120.142 v1(104.013,119.507) ; LED2.2 106.045,90.043 107.442,88.646 ; C20.2 107.321,81.02 ; v1(109.728,73.533) 109.093,73.533 108.585,73.025 C21.2 C21.2@105.791,73.025 ; C10.2 111.252,95.504 ; v1(112.993,85.561) 112.305,85.561 111.633,86.233 C11.2 110.744,88.646 ; v1(118.146,101.981) 117.892,101.727 110.871,101.727 ; 30.607,99.949 31.242,99.949 32.223,100.93 34.29,100.93 ; 34.29,100.93 34.29,106.553 35.56,107.823 C38.2 38.862,113.157 39.878,114.173 C35.2 46.482,114.173 C31.2 47.117,116.713 48.006,117.602 C32.2 54.61,120.015 55.372,120.777 60.452,120.777 61.087,120.142 ; 50.292,73.025 Led_matrix1.2 44.83,73.025 v1(43.942,72.137) 43.942,64.77 44.958,63.754 51.943,63.754 ; 51.943,56.388 51.943,63.754 ; 57.531,76.121 59.158,77.748 v1(74.168,77.748) C2.2 ; 61.087,120.142 61.722,120.777 82.042,120.777 83.312,119.507 83.312,115.189 ; 72.263,39.878 v1(73.533,38.608) C16.2 79.375,39.116 C18.2 87.503,39.116 88.773,40.386 C17.2 87.376,42.545 86.36,43.561 86.36,55.88 87.757,57.277 98.044,57.277 ; 83.312,115.189 82.804,114.681 82.804,112.268 83.566,111.506 89.281,111.506 90.043,112.268 C13.2 95.25,115.57 C14.2 97.028,116.205 98.552,114.681 C7.2 101.473,112.395 103.886,109.982 C8.2 108.839,104.521 109.982,103.378 C9.2 110.871,101.727 ; 98.044,57.277 98.044,66.294 98.679,66.929 C22.2 103.251,72.263 104.013,73.025 C21.2@105.791,73.025 ; C21.2@105.791,73.025 104.648,74.168 104.648,79.629 106.039,81.02 107.321,81.02 ; 107.321,81.02 106.68,81.661 106.68,87.884 107.442,88.646 ; 107.442,88.646 110.744,88.646 ; 110.744,88.646 110.109,89.281 110.109,94.361 111.252,95.504 ; 110.871,101.727 110.871,95.885 111.252,95.504
IO0: B2.2 Q2.3 R5.2 U1.25 | length 46.9
  Top Layer w0.5: U1.25 60.936,94.258 v1(62.357,92.837) ; v1(80.772,87.757) 81.153,87.376 v1(84.455,87.376)
  Bottom Layer w0.4: R5.2 87.193,92.019 B2.2 87.569,93.985 Q2.3
  Bottom Layer w0.5: v1(62.357,92.837) 80.137,92.837 80.772,92.202 v1(80.772,87.757) ; v1(84.455,87.376) 85.09,88.011 R5.2
Net: R1.2 U1.33 | length 3.2
  Top Layer w0.4: R1.2 59.197,83.819 U1.33
NetLED1_1: LED1.1 R1.1 | length 3
  Top Layer w0.4: LED1.1 51.435,83.819 R1.1
NetLED2_1: LED2.1 R2.1 | length 10
  Bottom Layer w0.4: R2.1 93.98,89.916 94.488,90.424 98.044,90.424 98.933,89.535 98.933,88.646 99.822,87.757 LED2.1
NetLED3_1: LED3.1 R3.2 | length 5.9
  Top Layer w0.5: LED3.1 60.706,63.754 61.976,65.024 R3.2
NetLED3_2: LED3.2 LED4.1 | length 2.3
  Top Layer w0.5: LED4.1 LED3.2
NetLED4_2: LED4.2 LED7.1 | length 9.8
  Top Layer w0.5: LED4.2 62.357,54.61 62.992,55.245 LED7.1
NetLED5_1: LED5.1 R6.2 | length 11.4
  Top Layer w0.5: R6.2 67.183,65.151 68.072,64.262 73.66,64.262 74.168,63.754 LED5.1
NetLED5_2: LED5.2 LED8.1 | length 2.3
  Top Layer w0.5: LED8.1 LED5.2
NetLED6_1: LED6.1 R7.2 | length 17.1
  Top Layer w0.5: R7.2 75.437,66.549 77.306,64.68 v1(77.306,58.42) ; v1(81.661,58.42) LED6.1
  Bottom Layer w0.5: v1(77.306,58.42) v1(81.661,58.42)
NetLED6_2: LED6.2 LED11.1 | length 5
  Top Layer w0.5: LED6.2 85.344,59.69 87.503,61.849 LED11.1
NetLED7_2: LED7.2 LED9.1 | length 5.9
  Top Layer w0.5: LED7.2 65.278,58.928 65.913,58.293 LED9.1
NetLED8_2: LED8.2 LED12.1 | length 8.3
  Top Layer w0.5: LED8.2 v1(76.327,54.61) ; v1(80.264,53.213) 80.264,54.61 LED12.1
  Bottom Layer w0.5: v1(76.327,54.61) 77.978,54.61 79.375,53.213 v1(80.264,53.213)
NetLED9_2: LED9.2 LED10.1 | length 3.7
  Top Layer w0.5: LED9.2 67.31,61.849 67.945,62.484 LED10.1
NetLED11_2: LED11.2 LED15.1 | length 2.5
  Top Layer w0.5: LED15.1 LED11.2
NetLED12_2: LED12.2 LED13.1 | length 2.5
  Top Layer w0.5: LED12.2 LED13.1
NetLED13_2: LED13.2 LED14.1 | length 2.9
  Top Layer w0.5: LED13.2 81.026,62.484 LED14.1
NetLED15_2: LED15.2 LED16.1 | length 12.6
  Top Layer w0.5: LED15.2 90.768,54.737 91.694,55.663 91.694,61.087 92.456,61.849 LED16.1
NetLED16_2: LED16.2 LED17.1 | length 2.7
  Top Layer w0.5: LED17.1 LED16.2
NetLed_matrix1_3: Led_matrix1.3 U1.37 | length 18.7
  Top Layer w0.5: v1(53.34,70.993) 53.34,78.105 54.253,79.018 U1.37
  Bottom Layer w0.5: Led_matrix1.3 52.832,70.485 v1(53.34,70.993)
NetLed_matrix1_4: Led_matrix1.4 U1.29 | length 36.2
  Top Layer w0.5: Led_matrix1.4 50.673,67.945 51.562,68.834 51.562,77.089 51.054,77.597 49.149,77.597 48.514,78.232 48.514,87.63 49.53,88.646 58.301,88.646 58.833,89.178 U1.29
NetLed_matrix1_5: Led_matrix1.5 U1.30 | length 37.9
  Top Layer w0.5: Led_matrix1.5 51.688,65.405 52.324,66.041 52.324,77.621 51.586,78.359 49.657,78.359 49.403,78.613 49.403,87.122 49.911,87.63 58.663,87.63 58.941,87.908 U1.30
NetQ1_1: Q1.1 R8.2 | length 14.2
  Bottom Layer w0.4: Q1.1 92.989,98.4 93.599,97.79 97.759,97.79 98.394,98.425 98.394,100.934 99.06,101.6 101.6,101.6 101.981,101.219 R8.2
NetQ2_1: Q2.1 R9.2 | length 11.7
  Bottom Layer w0.4: Q2.1 92.862,92.05 93.472,91.44 101.346,91.44 101.854,91.948 R9.2
NetU1_8: U1.8 U32.4 | length 46.6
  Top Layer w0.4: 72.263,89.662 73.025,88.9 73.025,87.757 74.144,86.638 U1.8
  Top Layer w0.5: U32.4 55.246,91.82 56.515,90.551 v1(56.515,89.662) ; v1(64.008,89.662) 72.263,89.662
  Bottom Layer w0.5: v1(56.515,89.662) v1(64.008,89.662)
NetU1_10: U1.10 U24.4 | length 61
  Top Layer w0.4: U24.4@74.205,32.257 74.548,32.257 78.359,36.068 78.359,71.628 79.121,72.39 79.121,88.646 78.589,89.178 U1.10
NetU1_11: U1.11 U16.4 | length 44.6
  Top Layer w0.4: U1.11 107.545,90.448 109.474,88.519 109.474,81.28 110.743,80.011 U16.4
NetU1_12: U1.12 U8.4 | length 25
  Top Layer w0.4: U1.12 78.637,91.718 79.375,92.456 79.375,112.523 78.994,112.904 U8.4
NetU4_2: U4.2 U5.4 | length 10.5
  Top Layer w0.4: U4.2 117.982,115.061 118.745,114.298 118.745,107.822 119.126,107.441 U5.4
NetU4_4: U4.4 U11.2 | length 11.6
  Top Layer w0.4: U11.2 109.983,120.903 110.49,120.396 110.49,112.142 110.871,111.761 U4.4
NetU5_2: U5.2 U6.4 | length 8.5
  Top Layer w0.4: U5.2 115.406,97.791 U6.4
NetU6_2: U6.2 U7.4 | length 10.6
  Top Layer w0.4: U7.4 119.888,92.238 119.888,98.933 120.522,99.567 U6.2
NetU8_2: U8.2 U9.4 | length 5.3
  Top Layer w0.4: U8.2 82.206,117.512 83.059,118.365 U9.4
NetU9_2: U9.2 U10.4 | length 4.3
  Top Layer w0.4: U9.2 94.834,121.665 U10.4
NetU10_2: U10.2 U11.4 | length 10.5
  Top Layer w0.4: U10.2 101.093,124.84 101.854,124.079 101.854,118.237 102.488,117.603 U11.4
NetU12_2: U12.2 U13.4 | length 3.9
  Top Layer w0.4: U13.4 96.774,45.809 96.774,48.134 U12.2
NetU12_4: U12.4 U19.2 | length 4.5
  Top Layer w0.4: U12.4 102.452,52.212 U19.2
NetU13_2: U13.2 U14.4 | length 3.8
  Top Layer w0.4: U14.4 91.403,40.311 U13.2
NetU14_2: U14.2 U15.4 | length 4.4
  Top Layer w0.4: U15.4 85.053,35.231 U14.2
NetU16_2: U16.2 U17.4 | length 14.4
  Top Layer w0.4: U17.4 119.38,75.437 120.142,76.199 120.142,82.574 119.405,83.311 U16.2
NetU17_2: U17.2 U18.4 | length 5.1
  Top Layer w0.4: U17.2 110.072,69.288 U18.4
NetU18_2: U18.2 U19.4 | length 4.9
  Top Layer w0.4: U18.2 106.77,61.505 107.442,60.833 107.442,59.906 U19.4
NetU20_2: U20.2 U21.4 | length 12.6
  Top Layer w0.4: U21.4 40.258,65.152 40.894,64.516 40.894,57.023 41.147,56.77 U20.2
NetU20_4: U20.4 U27.2 | length 12.1
  Top Layer w0.4: U20.4 50.928,60.07 52.107,58.891 U27.2
NetU21_2: U21.2 U22.4 | length 9.9
  Top Layer w0.4: U22.4 40.768,75.691 42.328,74.131 U21.2
NetU22_2: U22.2 U23.4 | length 9.8
  Top Layer w0.4: U23.4 31.9,80.392 32.131,80.161 32.131,74.132 U22.2
NetU24_2: U24.2 U25.4 | length 11.5
  Top Layer w0.4: U25.4 62.102,35.561 68.706,28.957 U24.2@69.305,28.957
NetU25_2: U25.2 U26.4 | length 12.1
  Top Layer w0.4: U26.4 63.754,45.338 65.442,43.65 U25.2
NetU26_2: U26.2 U27.4 | length 11.2
  Top Layer w0.4: U27.4 49.656,49.023 52.197,46.482 52.197,43.779 U26.2
NetU28_2: U28.2 U29.4 | length 4
  Top Layer w0.5: U28.2 50.765,121.665 U29.4
NetU28_4: U28.4 U35.2 | length 4.7
  Top Layer w0.5: U35.2 39.407,117.258 40.514,118.365 U28.4
NetU29_2: U29.2 U30.4 | length 8.6
  Top Layer w0.5: U29.2 58.039,122.591 58.039,119.253 58.546,118.746 U30.4
NetU30_2: U30.2 U31.4 | length 11.6
  Top Layer w0.5: U30.2 67.183,119.67 67.183,113.792 68.071,112.904 U31.4
NetU32_2: U32.2 U33.4 | length 9.2
  Top Layer w0.5: U33.4 27.522,88.81 27.812,88.52 U32.2
NetU33_2: U33.2 U34.4 | length 7
  Top Layer w0.5: U34.4 31.496,104.903 32.422,103.977 U33.2
NetU34_2: U34.2 U35.4 | length 4.1
  Top Layer w0.5: U35.4 34.708,112.068 U34.2
RST: Q1.2 R9.1 U2.14 | length 90.1
  Top Layer w0.5: v1(56.959,103.251) 57.488,102.722 76.581,102.722 77.097,103.239 77.097,106.307 77.47,106.68 v1(77.851,106.68) ; v1(90.805,101.061) v1(90.805,103.759)
  Bottom Layer w0.4: Q1.2 92.984,100.901 94.952,98.933 96.52,98.933 97.155,99.568 97.155,100.711 98.806,102.362 102.743,102.362 103.378,101.727 103.378,95.758 102.87,95.25 100.584,95.25 99.568,94.234 R9.1
  Bottom Layer w0.5: U2.14 42.164,100.37 42.724,100.93 57.781,100.93 58.547,101.696 58.547,102.743 58.039,103.251 v1(56.959,103.251) ; v1(77.851,106.68) 83.947,106.68 84.963,105.664 84.963,104.14 85.344,103.759 v1(90.805,103.759) ; v1(90.805,101.061) Q1.2
pads on no net: J1.4 U1.4 U1.5 U1.6 U1.7 U1.9 U1.13 U1.14 U1.15 U1.16 U1.17 U1.18 U1.19 U1.20 U1.21 U1.22 U1.23 U1.24 U1.26 U1.27 U1.28 U1.31 U1.32 U1.36 U1.38 U1.39 U2.7 U2.8 U2.9 U2.10 U2.11 U2.12 U2.15 U7.2 U15.2 U23.2 U31.2

## Polygon pours and split planes (outlines as drawn)
GND on Top Layer "GND_top" (solid, pour order 0): 25.4,126.365 123.825,126.365 123.825,27.559 25.4,27.559
GND on Bottom Layer "GND_bottom" (solid, pour order 2): 25.4,126.365 123.825,126.365 123.825,27.559 25.4,27.559

## Silkscreen, mask and mechanical layers (free items; w line width, h text height)
Top Overlay:
  text "DUY TRUONG /     LOVE     / THANH MAI" at 80.137,80.518 h2.5